# EAGLE board PCB (EAGLE 9.7.0)
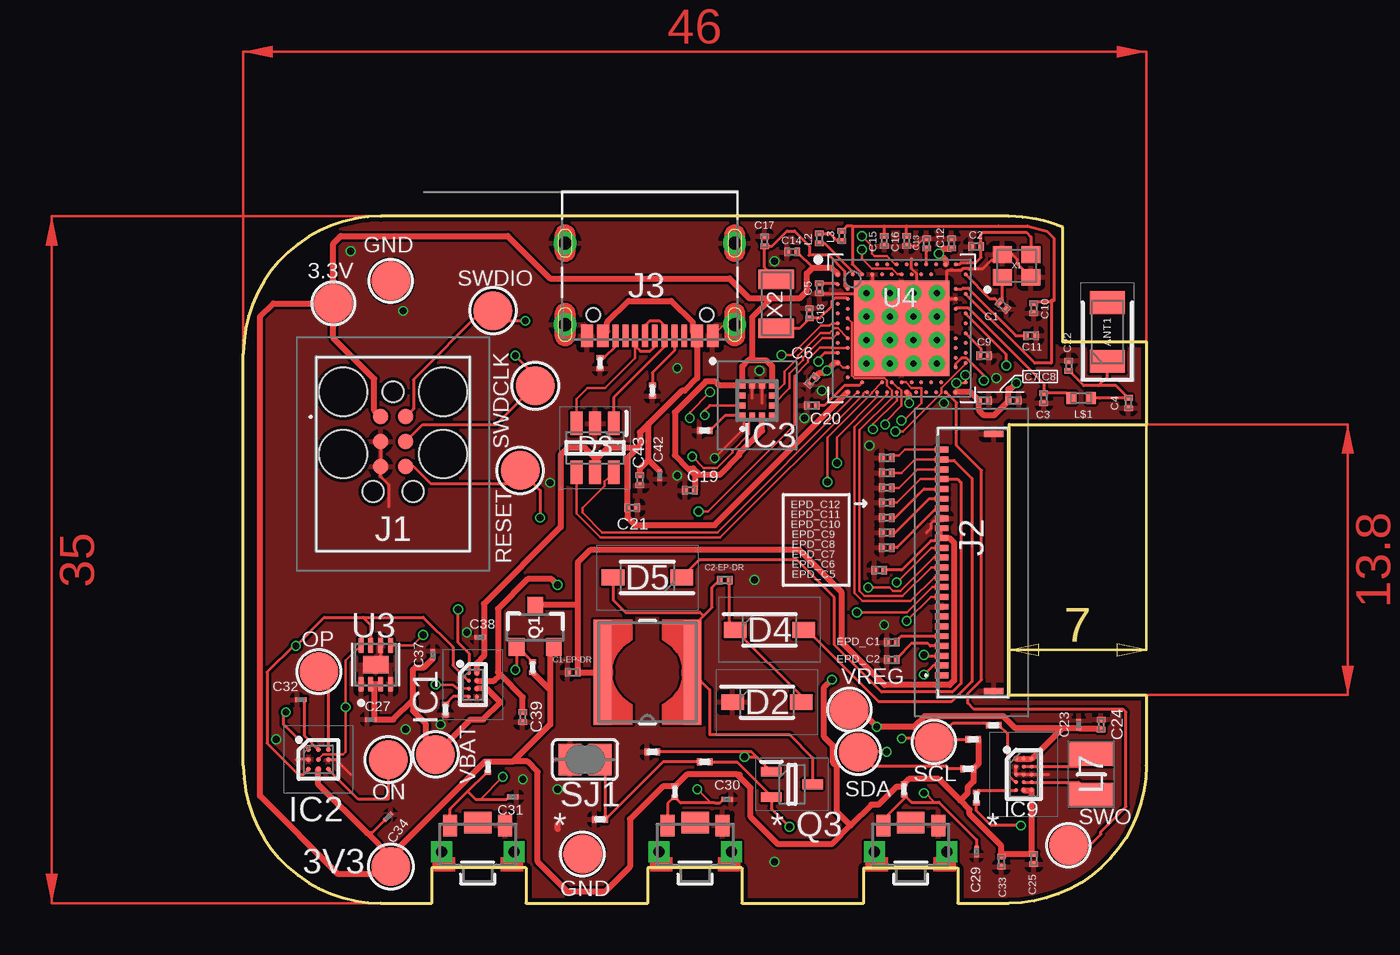
[diagram p0: board, top side]
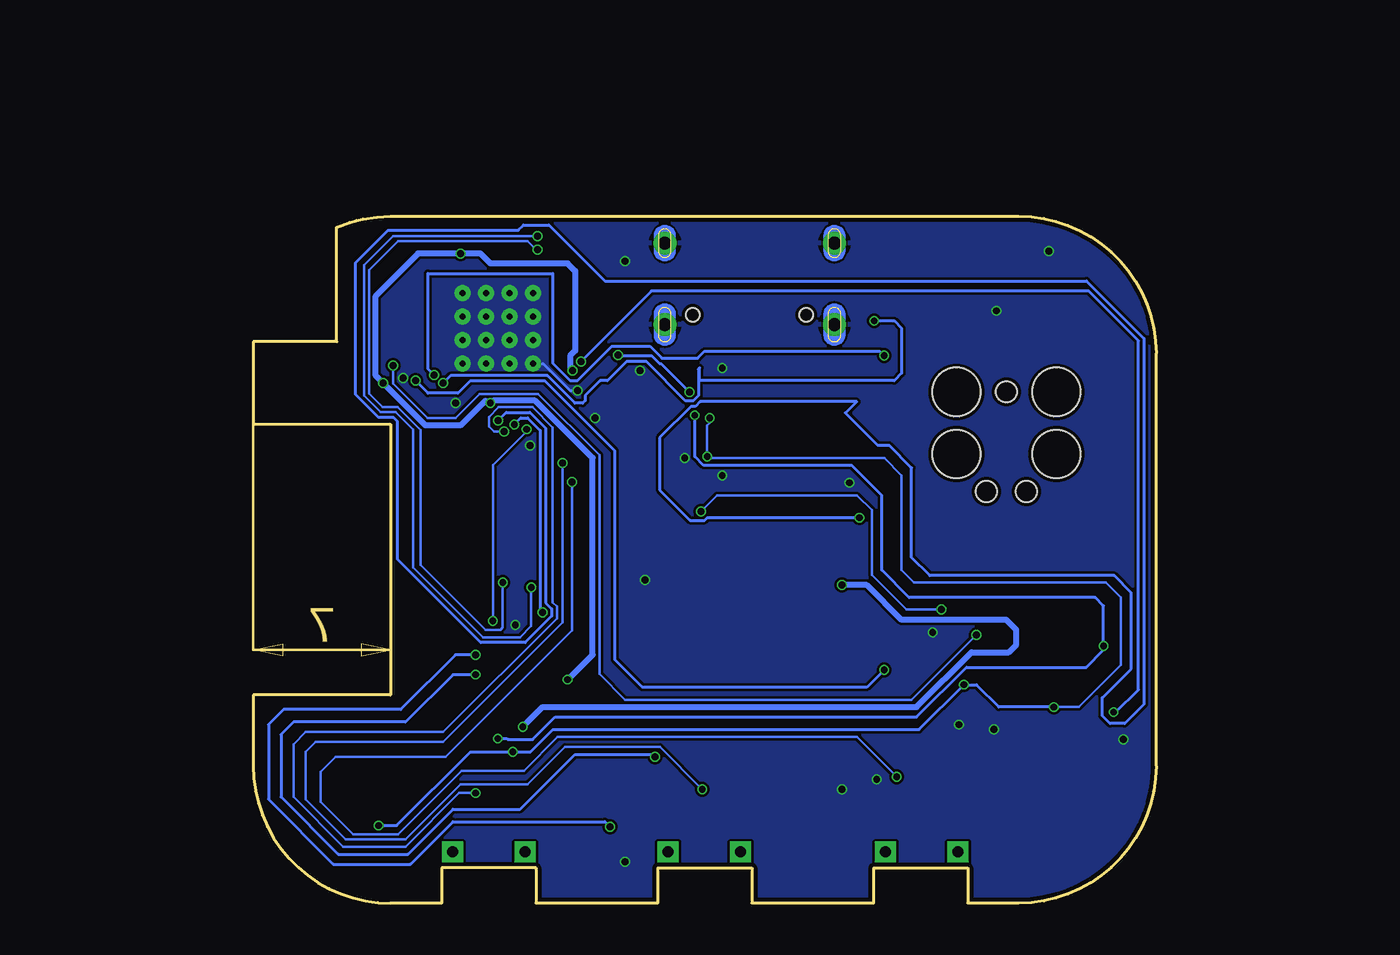
[diagram p1: board, bottom side, seen from below]

Size 46 x 35 mm. Coordinates in mm from the lower left corner, seen from the top.
Outline: 7,0 9.6,0 9.6,1.8 14.4,1.8 14.4,0 20.6,0 20.6,1.8 25.4,1.8 25.4,0 31.6,0 31.6,1.8 36.4,1.8 36.4,0 39,0 arc90 46,7 46,10.6 39,10.6 39,24.4 46,24.4 46,28.61 41.75,28.61 41.75,34.44 41.09,34.69 40.75,34.78 40.4,34.86 39.7,34.95 39,35 7,35 arc90 0,28 0,7 arc90 7,0
Copper layers (1*16): Top 0.035mm / dielectric 1.6mm / Bottom 0.035mm
Design rules "jlcpcb-2layers.dru": minimum track width 5mil, minimum drill 0.3mm, track to track 5mil, track to pad 5mil, pad to pad 5mil, via to via 5mil, smd to smd 5mil, copper to edge 0.2mm, drill to drill 6mil, minimum pad ring 10mil, minimum via ring 3mil, stop-mask expansion 4mil, vias tented up to drill 0mil, thermal gap 10mil

## Footprints (pad centres in the part's own frame; a part is rotated, then mirrored left to right if it is on the bottom)
HECTOR_WATCH_1_TP20R = smd 2 x 2: TP 0,0
2450AT18B100E_ANTC3216X140N = smd 1.15 x 1.8: 1 -1.5,0; 2 1.5,0
NORDIC_NRF_3_RESC0201_L = smd 0.28 x 0.43: 1 -0.255,0; 2 0.255,0
GRM011R60J152KE01L_2_CAPC0201X13N = smd 0.22 x 0.23: 1 -0.185,0; 2 0.185,0
ESP32_C6_LIBRARY_5_SOD3716X135N = smd 1.15 x 0.8: 1 -1.75,0; 2 1.75,0
ESP32_C6_LIBRARY_3_SOT95P280X145-6N = smd 1.2 x 0.6: 1 -1.25,0.95; 2 -1.25,0; 3 -1.25,-0.95; 4 1.25,-0.95; 5 1.25,0; 6 1.25,0.95
BQ25180YBGR_BGA8C40P2X4_100X155X50 = smd 0.2 x 0.2: A1 -0.2,0.6; A2 0.2,0.6; B1 -0.2,0.2; B2 0.2,0.2; C1 -0.2,-0.2; C2 0.2,-0.2; D1 -0.2,-0.6; D2 0.2,-0.6
DRV2605YZFR_BGA9C50P3X3_144X144X62 = smd 0.25 x 0.25: A1 -0.5,0.5; A2 0,0.5; A3 0.5,0.5; B1 -0.5,0; B2 0,0; B3 0.5,0; C1 -0.5,-0.5; C2 0,-0.5; C3 0.5,-0.5
BMA423_BMA423 = smd 0.3 x 0.35: 1 -0.75,-0.775; 2 -0.25,-0.775; 3 0.25,-0.775; 4 0.75,-0.775; 7 0.75,0.775; 8 0.25,0.775; 9 -0.25,0.775; 10 -0.75,0.775 | smd 0.35 x 0.3: 5 0.775,-0.25; 6 0.775,0.25; 11 -0.775,0.25; 12 -0.775,-0.25
RT6160AWSC_BGA15C40P3X5_140X230X60 = smd 0.216 x 0.216: A1 -0.4,0.8; A2 0,0.8; A3 0.4,0.8; B1 -0.4,0.4; B2 0,0.4; B3 0.4,0.4; C1 -0.4,0; C2 0,0; C3 0.4,0; D1 -0.4,-0.4; D2 0,-0.4; D3 0.4,-0.4; E1 -0.4,-0.8; E2 0,-0.8; E3 0.4,-0.8
TC2030-IDC_TC2030IDC = smd 0.783 x 0.783: 1 -0.953,-0.635; 2 -0.953,0.635; 3 0.317,-0.635; 4 0.317,0.635; 5 1.588,-0.635; 6 1.588,0.635 | hole 2.451: -2.223,-2.54; -2.223,2.54; 0.952,-2.54; 0.952,2.54 | hole 1.067: -2.223,0; 2.857,-1.016; 2.857,1.016
503480-2400_5034802400 = smd 0.3 x 0.7: 1 -5.75,1.525; 2 -5.25,1.525; 3 -4.75,1.525; 4 -4.25,1.525; 5 -3.75,1.525; 6 -3.25,1.525; 7 -2.75,1.525; 8 -2.25,1.525; 9 -1.75,1.525; 10 -1.25,1.525; 11 -0.75,1.525; 12 -0.25,1.525; 13 0.25,1.525; 14 0.75,1.525; 15 1.25,1.525; 16 1.75,1.525; 17 2.25,1.525; 18 2.75,1.525; 19 3.25,1.525; 20 3.75,1.525; 21 4.25,1.525; 22 4.75,1.525; 23 5.25,1.525; 24 5.75,1.525 | smd 0.3 x 1: MP1 -6.54,-1.125; MP2 6.54,-1.125
KH-TYPE-C-16P_KINGHELM_KH-TYPE-C-16P = smd 0.6 x 1.15: A1_B12 -3.2,4.725; A4_B9 -2.4,4.725; A9_B4 2.4,4.725; A12_B1 3.2,4.725 | smd 0.3 x 1.15: A5 -1.25,4.725; A6 -0.25,4.725; A7 0.25,4.725; A8 1.25,4.725; B5 1.75,4.725; B6 0.75,4.725; B7 -0.75,4.725; B8 -1.75,4.725 | drill 0.65 pad 1.05: SH1 -4.32,0; SH2 4.32,0; SH3 -4.32,4.15; SH4 4.32,4.15 | hole 0.7: -2.89,3.65; 2.89,3.65
ESP32_C6_LIBRARY_2_IND_4828-WE-TPC_WRE = smd 0.9 x 5.3: 1 -2.286,0; 2 2.286,0
NORDIC_NRF_2_RESC0201_L = smd 0.28 x 0.43: 1 -0.255,0; 2 0.255,0
MLP2016SR47MT0S1_INDC2016X100N = smd 1.2 x 2.2: 1 -1.028,0; 2 1.028,0
NORDIC_NRF_2_RESC0402_L = smd 0.5 x 0.6: 1 -0.5,0; 2 0.5,0
ESP32_C6_LIBRARY_4_ESP32_C6_LIBRARY_4_ESP32_C6_LIBRARY_4_ESP32_C6_LIBRARY_4_ESP32_WROVER_SPARKFUN-DISCRETESEMI_SOT23-3 = smd 0.8 x 0.9: 1 -0.95,-1; 2 0.95,-1; 3 0,1.1
ESP32_C6_LIBRARY_6_SOT65P210X110-3N = smd 1.05 x 0.5: 1 -1.05,0.65; 2 -1.05,-0.65; 3 1.05,0
ERA-1AEB3401C_0201 = smd 0.35 x 0.25: 1 0,0.275; 2 0,-0.275
CPF0201D7K68C1_0201 = smd 0.35 x 0.25: 1 0,0.275; 2 0,-0.275
ESP32_C6_LIBRARY_7_JUMPER_SJ = smd 1.168 x 1.6: 1 -0.762,0; 2 0.762,0
2025-10-22_07-23-44_LIBRARY_SW_EVP-AKE31A_PAN = smd 0.711 x 1.092: 1 -1.4,-0.972; 2 1.4,-0.972 | drill 0.559 pad 0.914 square: 3 -1.848,0.381; 4 1.848,0.381 | smd 1.397 x 1.092: 5 0,-1.124
ESP32_C6_LIBRARY_SON50P200X200X80-9N = smd 0.76 x 0.27: 1 -0.985,0.75; 2 -0.985,0.25; 3 -0.985,-0.25; 4 -0.985,-0.75; 5 0.985,-0.75; 6 0.985,-0.25; 7 0.985,0.25; 8 0.985,0.75 | smd 0.9 x 1.3: 9 0,0
NORDIC_NRF_4_AQFN50P700X700X85_HS-74N = smd 4.85 x 4.85: P$74 0,0 | drill 0.3 pad 0.6: P$75 -1.8,1.8; P$76 -0.6,1.8; P$77 0.6,1.8; P$78 1.8,1.8; P$79 -1.8,0.6; P$80 -0.6,0.6; P$81 0.6,0.6; P$82 1.8,0.6; P$83 -1.8,-0.6; P$84 -0.6,-0.6; P$85 0.6,-0.6; P$86 1.8,-0.6; P$87 -1.8,-1.8; P$88 -0.6,-1.8; P$89 0.6,-1.8; P$90 1.8,-1.8 | smd 0.2 x 0.2: P$A8 -1.25,3.25; P$A10 -0.75,3.25; P$A12 -0.25,3.25; P$A14 0.25,3.25; P$A16 0.75,3.25; P$A18 1.25,3.25; P$A20 1.75,3.25; P$A22 2.25,3.25; P$A23 2.75,3.25; P$AA24 3.25,-2.25; P$AB2 -2.75,-2.5; P$AC5 -2,-2.75; P$AC9 -1,-2.75; P$AC11 -0.5,-2.75; P$AC13 0,-2.75; P$AC15 0.5,-2.75; P$AC17 1,-2.75; P$AC19 1.5,-2.75; P$AC21 2,-2.75; P$AC24 3.25,-2.75; P$AD2 -2.75,-3.25; P$AD4 -2.25,-3.25; P$AD6 -1.75,-3.25; P$AD8 -1.25,-3.25; P$AD10 -0.75,-3.25; P$AD12 -0.25,-3.25; P$AD14 0.25,-3.25; P$AD16 0.75,-3.25; P$AD18 1.25,-3.25; P$AD20 1.75,-3.25; P$AD22 2.25,-3.25; P$AD23 2.75,-3.25; P$B1 -3.25,2.75; P$B3 -2.5,2.75; P$B5 -2,2.75; P$B7 -1.5,2.75; P$B9 -1,2.75; P$B11 -0.5,2.75; P$B13 0,2.75; P$B15 0.5,2.75; P$B17 1,2.75; P$B19 1.5,2.75; P$B24 3.25,2.75; P$C1 -3.25,2.25; P$D2 -2.75,2; P$D23 2.75,2; P$E24 3.25,1.75; P$F2 -2.75,1.5; P$F23 2.75,1.5; P$G1 -3.25,1.25; P$H2 -2.75,1; P$H23 2.75,1; P$J1 -3.25,0.75; P$J24 3.25,0.75; P$K2 -2.75,0.5; P$L1 -3.25,0.25; P$L24 3.25,0.25; P$M2 -2.75,0; P$N1 -3.25,-0.25; P$N24 3.25,-0.25; P$P2 -2.75,-0.5; P$P23 2.75,-0.5; P$R1 -3.25,-0.75; P$R24 3.25,-0.75; P$T2 -2.75,-1; P$T23 2.75,-1; P$U1 -3.25,-1.25; P$U24 3.25,-1.25; P$V23 2.75,-1.5; P$W1 -3.25,-1.75; P$W24 3.25,-1.75; P$Y2 -2.75,-2; P$Y23 2.75,-2
NORDIC_NRF_BT-XTAL_2016_N = smd 0.95 x 0.85: 1 -0.725,-0.575; 2 0.725,-0.575; 3 0.725,0.575; 4 -0.725,0.575
NORDIC_NRF_1_XTAL_3215_N = smd 1 x 1.8: 1 -1.25,0; 2 1.25,0

## Placement (x,y rotation side)
3.3V  HECTOR_WATCH_1_TPTP20R  [HECTOR_WATCH_1_TP20R]  4.58,30.56 0 top
3V3  HECTOR_WATCH_1_TPTP20R  [HECTOR_WATCH_1_TP20R]  7.5,1.86 90 top
ANT1  2450AT18B100E  [2450AT18B100E_ANTC3216X140N]  44.01,29.1 90 top
C1  12pF  [NORDIC_NRF_3_RESC0201_L]  38.69,30.44 319.3 top
C1-EP-DR  10uF  [NORDIC_NRF_3_RESC0201_L]  16.77,11.77 180 top
C2  12pF  [NORDIC_NRF_3_RESC0201_L]  37.32,33.46 180 top
C2-EP-DR  4.7uF  [NORDIC_NRF_3_RESC0201_L]  24.52,16.47 180 top
C3  1pF  [NORDIC_NRF_3_RESC0201_L]  40.78,25.74 270 top
C4  1pF  [NORDIC_NRF_3_RESC0201_L]  45.09,25.48 270 top
C5  100nF  [NORDIC_NRF_3_RESC0201_L]  29.35,31.33 270 top
C6  4.7μF  [NORDIC_NRF_3_RESC0201_L]  28.97,26.63 228.3 top
C7  100nF  [NORDIC_NRF_3_RESC0201_L]  37.73,25.61 0 top
C8  100nF N.C.  [NORDIC_NRF_3_RESC0201_L]  39.25,25.61 0 top
C9  820pF  [NORDIC_NRF_3_RESC0201_L]  37.73,27.9 0 top
C10  N.C.  [NORDIC_NRF_3_RESC0201_L]  40.27,30.31 270 top
C11  100pF  [NORDIC_NRF_3_RESC0201_L]  40.14,28.91 0 top
C12  100nF  [NORDIC_NRF_3_RESC0201_L]  36.08,33.61 90 top
C13  N.C.  [NORDIC_NRF_3_RESC0201_L]  34.81,33.61 90 top
C14  4.7μF  [NORDIC_NRF_3_RESC0201_L]  27.95,33.19 180 top
C15  1.0μF  [NORDIC_NRF_3_RESC0201_L]  32.65,33.74 270 top
C16  47nF  [NORDIC_NRF_3_RESC0201_L]  33.79,33.74 270 top
C17  12pF  [NORDIC_NRF_3_RESC0201_L]  26.55,33.73 270 top
C18  12pF  [NORDIC_NRF_3_RESC0201_L]  28.84,30.05 270 top
C19  100nF  [NORDIC_NRF_3_RESC0201_L]  22.74,21.04 180 top
C20  4.7μF  [NORDIC_NRF_3_RESC0201_L]  28.97,25.36 180 top
C21  4.7μF  [NORDIC_NRF_3_RESC0201_L]  19.82,20.15 0 top
C22  N.C.  [NORDIC_NRF_3_RESC0201_L]  42.05,27.39 90 top
C23  0.1uF  [GRM011R60J152KE01L_2_CAPC0201X13N]  42.55,9.1 270 top
C24  10uF  [NORDIC_NRF_3_RESC0201_L]  43.7,9.1 270 top
C25  22uF  [NORDIC_NRF_3_RESC0201_L]  40.27,2.24 270 top
C27  0.1uF  [GRM011R60J152KE01L_2_CAPC0201X13N]  6.49,9.35 0 top
C29  1uF  [GRM011R60J152KE01L_2_CAPC0201X13N]  37.35,2.62 90 top
C30  1uF  [GRM011R60J152KE01L_2_CAPC0201X13N]  24.65,5.29 180 top
C31  1uF  [GRM011R60J152KE01L_2_CAPC0201X13N]  13.72,5.42 180 top
C32  1uF  [GRM011R60J152KE01L_2_CAPC0201X13N]  2.93,10.37 0 top
C33  22uF  [NORDIC_NRF_3_RESC0201_L]  38.62,2.12 270 top
C34  0.1uF  [GRM011R60J152KE01L_2_CAPC0201X13N]  7.37,4.4 225 top
C37  1uF  [GRM011R60J152KE01L_2_CAPC0201X13N]  9.66,12.66 270 top
C38  1uF  [GRM011R60J152KE01L_2_CAPC0201X13N]  12.07,13.55 0 top
C39  10uF  [NORDIC_NRF_3_RESC0201_L]  14.23,9.48 270 top
C42  0.1uF  [GRM011R60J152KE01L_2_CAPC0201X13N]  21.22,21.8 270 top
C43  4.7uF  [NORDIC_NRF_3_RESC0201_L]  20.2,21.55 270 top
D2  MBR0530  [ESP32_C6_LIBRARY_5_SOD3716X135N]  26.68,10.24 0 top
D3  USBLC6-2SC6Y  [ESP32_C6_LIBRARY_3_SOT95P280X145-6N]  17.92,23.2 270 top
D4  MBR0530  [ESP32_C6_LIBRARY_5_SOD3716X135N]  26.81,13.93 0 top
D5  MBR0530  [ESP32_C6_LIBRARY_5_SOD3716X135N]  20.58,16.59 180 top
EPD_C1  1uF/50V  [NORDIC_NRF_3_RESC0201_L]  33.03,13.29 0 top
EPD_C2  1uF/50V  [NORDIC_NRF_3_RESC0201_L]  33.03,12.4 0 top
EPD_C5  0.1uF/50V  [NORDIC_NRF_3_RESC0201_L]  32.39,16.97 0 top
EPD_C6  1uF/50V  [NORDIC_NRF_3_RESC0201_L]  32.77,18.12 0 top
EPD_C7  1uF/50V  [NORDIC_NRF_3_RESC0201_L]  32.77,18.88 0 top
EPD_C8  1uF/50V  [NORDIC_NRF_3_RESC0201_L]  32.77,19.64 0 top
EPD_C9  1uF/50V  [NORDIC_NRF_3_RESC0201_L]  32.77,20.4 0 top
EPD_C10  1uF/50V  [NORDIC_NRF_3_RESC0201_L]  32.77,21.17 0 top
EPD_C11  1uF/50V  [NORDIC_NRF_3_RESC0201_L]  32.77,21.93 0 top
EPD_C12  1uF/50V  [NORDIC_NRF_3_RESC0201_L]  32.77,22.69 0 top
GND  HECTOR_WATCH_1_TPTP20R  [HECTOR_WATCH_1_TP20R]  7.5,31.71 0 top
IC1  BQ25180YBGR  [BQ25180YBGR_BGA8C40P2X4_100X155X50]  11.69,11.13 0 top
IC2  DRV2605YZFR  [DRV2605YZFR_BGA9C50P3X3_144X144X62]  3.82,7.32 0 top
IC3  BMA423  [BMA423_BMA423]  26.17,25.61 0 top
IC9  RT6160AWSC  [RT6160AWSC_BGA15C40P3X5_140X230X60]  39.76,6.56 0 top
J1  TC2030-IDC  [TC2030-IDC_TC2030IDC]  7.63,23.83 270 top
J2  503480-2400  [503480-2400_5034802400]  37.1,17.36 90 top
J3  KH-TYPE-C-16P  [KH-TYPE-C-16P_KINGHELM_KH-TYPE-C-16P]  20.71,33.63 180 top
L1  68uH  [ESP32_C6_LIBRARY_2_IND_4828-WE-TPC_WRE]  20.58,11.77 180 top
L2  10μH  [NORDIC_NRF_2_RESC0201_L]  29.35,33.86 90 top
L3  15nH  [NORDIC_NRF_2_RESC0201_L]  30.49,33.99 90 top
L7  FTC252012SR47MBCA  [MLP2016SR47MT0S1_INDC2016X100N]  43.19,6.56 270 top
L$1  3.9nH  [NORDIC_NRF_2_RESC0402_L]  42.68,25.74 0 top
ON  HECTOR_WATCH_1_TPTP20R  [HECTOR_WATCH_1_TP20R]  7.37,7.32 0 top
OP  HECTOR_WATCH_1_TPTP20R  [HECTOR_WATCH_1_TP20R]  3.84,11.79 0 top
Q1  20V/4.2A/52mΩ/1.4W  [ESP32_C6_LIBRARY_4_ESP32_C6_LIBRARY_4_ESP32_C6_LIBRARY_4_ESP32_C6_LIBRARY_4_ESP32_WROVER_SPARKFUN-DISCRETESEMI_SOT23-3]  14.87,14.05 0 top
Q3  SI1308EDL-T1-GE3  [ESP32_C6_LIBRARY_6_SOT65P210X110-3N]  27.95,6.05 0 top
R1_EP_DR'  0.47  [ERA-1AEB3401C_0201]  23.5,7.2 90 top
R1_USB  5K1  [ERA-1AEB3401C_0201]  20.84,26.12 180 top
R2  0  [ERA-1AEB3401C_0201]  37.35,5.39 180 top
R2_EP_DR  10K  [ERA-1AEB3401C_0201]  20.84,7.7 90 top
R2_USB  5K1  [ERA-1AEB3401C_0201]  18.17,27.52 0 top
R3  0  [ERA-1AEB3401C_0201]  23.5,24.09 90 top
R4  0  [ERA-1AEB3401C_0201]  38.22,9.07 90 top
R5  10K  [ERA-1AEB3401C_0201]  21.98,5.67 180 top
R7  10K  [ERA-1AEB3401C_0201]  33.66,5.8 180 top
R8  10K  [ERA-1AEB3401C_0201]  12.46,6.94 180 top
R9  10k  [CPF0201D7K68C1_0201]  10.3,9.86 180 top
R17  3K3  [ERA-1AEB3401C_0201]  37.18,8.34 270 top
R18  3K3  [ERA-1AEB3401C_0201]  36.92,6.84 270 top
R_PWR_EPD  10k  [ERA-1AEB3401C_0201]  14.74,12.02 0 top
R_TYPE_SEL  2.2  [ERA-1AEB3401C_0201]  18.17,4.27 90 top
RESET  HECTOR_WATCH_1_TPTP20R  [HECTOR_WATCH_1_TP20R]  14.11,22.05 0 top
SCL  HECTOR_WATCH_1_TPTP20R  [HECTOR_WATCH_1_TP20R]  35.19,8.21 90 top
SDA  HECTOR_WATCH_1_TPTP20R  [HECTOR_WATCH_1_TP20R]  31.32,7.69 90 top
SJ1  [ESP32_C6_LIBRARY_7_JUMPER_SJ]  17.41,7.32 0 top
SW_DN  2025-10-22_07-23-44_LIBRARY_EVP-AKE31ASW_EVP-AKE31A_PAN  [2025-10-22_07-23-44_LIBRARY_SW_EVP-AKE31A_PAN]  34,2.99 180 top
SW_ENT  2025-10-22_07-23-44_LIBRARY_EVP-AKE31ASW_EVP-AKE31A_PAN  [2025-10-22_07-23-44_LIBRARY_SW_EVP-AKE31A_PAN]  11.94,2.99 180 top
SW_UP  2025-10-22_07-23-44_LIBRARY_EVP-AKE31ASW_EVP-AKE31A_PAN  [2025-10-22_07-23-44_LIBRARY_SW_EVP-AKE31A_PAN]  23.02,2.99 180 top
SWDCLK  HECTOR_WATCH_1_TPTP20R  [HECTOR_WATCH_1_TP20R]  14.87,26.37 0 top
SWDIO  HECTOR_WATCH_1_TPTP20R  [HECTOR_WATCH_1_TP20R]  12.71,30.18 0 top
SWO  HECTOR_WATCH_1_TPTP20R  [HECTOR_WATCH_1_TP20R]  42.03,2.95 0 top
TP_BAT_GND  HECTOR_WATCH_1_TPTP20R  [HECTOR_WATCH_1_TP20R]  17.28,2.5 0 top
U3  MAX17048G+T10  [ESP32_C6_LIBRARY_SON50P200X200X80-9N]  6.74,12.15 90 top
U4  NRF52840_QF  [NORDIC_NRF_4_AQFN50P700X700X85_HS-74N]  33.54,29.29 0 top
VBAT  HECTOR_WATCH_1_TPTP20R  [HECTOR_WATCH_1_TP20R]  9.79,7.58 0 top
VREG  HECTOR_WATCH_1_TPTP20R  [HECTOR_WATCH_1_TP20R]  30.87,9.86 90 top
X1  32MHz  [NORDIC_NRF_BT-XTAL_2016_N]  39.4,32.47 0 top
X2  32.768kHz  [NORDIC_NRF_1_XTAL_3215_N]  27.15,30.54 270 top

## Library data of the parts
3.3V 3V3 C1 C1-EP-DR C2 C2-EP-DR C3-C22 C24 C25 C33 C39 C43 EPD_C1 EPD_C2 EPD_C5-EPD_C12 GND L2 L3 L$1 ON OP R1_EP_DR' R1_USB R2 R2_EP_DR R2_USB R3-R5 R7-R9 R17 R18 R_PWR_EPD R_TYPE_SEL RESET SCL SDA SJ1 SWDCLK SWDIO SWO TP_BAT_GND U4 VBAT VREG X1 X2 = InkTime_v5
ANT1 = InkTime_v5; ARROW_PART_NUMBER: 2450AT18B100E; ARROW_PRICE-STOCK: https://www.arrow.com/en/products/2450at18b100e/johanson-dielectrics?utm_currency=USD&region=nac; DESCRIPTION: Antennas 2.45GHz ANTENNA; HEIGHT: 1.4mm; MANUFACTURER_NAME: JOHANSON TECHNOLOGY; MANUFACTURER_PART_NUMBER: 2450AT18B100E; MOUSER_PART_NUMBER: 609-2450AT18B100E; MOUSER_PRICE-STOCK: https://www.mouser.co.uk/ProductDetail/Johanson-Technology/2450AT18B100E?qs=yCnrNFeXz%252Bh5MFsFIXGZGA%3D%3D
C23 C27 C29-C32 C34 C37 C38 C42 = InkTime_v5; AVAILABILITY: In Stock; CHECK_PRICES: https://www.snapeda.com/parts/GRM011R60J152KE01L/Murata/view-part/?ref=eda; DESCRIPTION: SMD Capacitor X5R(EIA) with Capacitance: 1500pF Tol. 10%. Rated Voltage: 6.3Vdc; MF: Murata; MP: GRM011R60J152KE01L; PACKAGE: 0201 Murata; PRICE: None; SNAPEDA_LINK: https://www.snapeda.com/parts/GRM011R60J152KE01L/Murata/view-part/?ref=snap
D2 D4 D5 = InkTime_v5; AVAILABILITY: In Stock; CHECK_PRICES: https://www.snapeda.com/parts/MBR0530/Onsemi/view-part/?ref=eda; DESCRIPTION: Diode Schottky 30 V 500mA Surface Mount SOD-123; MF: ON Semiconductor; MP: MBR0530; PACKAGE: SOD-123-2 ON Semiconductor; PRICE: None; PURCHASE-URL: https://www.snapeda.com/api/url_track_click_mouser/?unipart_id=179458&manufacturer=ON Semiconductor&part_name=MBR0530&search_term=None; SNAPEDA_LINK: https://www.snapeda.com/parts/MBR0530/Onsemi/view-part/?ref=snap
D3 = InkTime_v5; AVAILABILITY: In Stock; CHECK_PRICES: https://www.snapeda.com/parts/USBLC6-2SC6Y/STMicroelectronics/view-part/?ref=eda; DESCRIPTION: 17V Clamp 5A (8/20µs) Ipp Tvs Diode Surface Mount SOT-23-6; MF: STMicroelectronics; MP: USBLC6-2SC6Y; PACKAGE: SOT-23-6 STMicroelectronics; PRICE: None; SNAPEDA_LINK: https://www.snapeda.com/parts/USBLC6-2SC6Y/STMicroelectronics/view-part/?ref=snap
IC1 = InkTime_v5; ARROW_PART_NUMBER: BQ25180YBGR; ARROW_PRICE-STOCK: https://www.arrow.com/en/products/bq25180ybgr/texas-instruments?utm_currency=USD&region=nac; DESCRIPTION: Charger IC Lithium Ion/Polymer, Lithium Iron Phosphate 8-DSBGA (1.6x1.1); HEIGHT: 0.5mm; MANUFACTURER_NAME: Texas Instruments; MANUFACTURER_PART_NUMBER: BQ25180YBGR; MOUSER_PART_NUMBER: 595-BQ25180YBGR; MOUSER_PRICE-STOCK: https://www.mouser.co.uk/ProductDetail/Texas-Instruments/BQ25180YBGR?qs=doiCPypUmgEWjAK%252BJAX6Tw%3D%3D
IC2 = InkTime_v5; ARROW_PART_NUMBER: DRV2605YZFR; ARROW_PRICE-STOCK: https://www.arrow.com/en/products/drv2605yzfr/texas-instruments?region=nac; DESCRIPTION: Haptic Driver for ERM/LRA with Built-In Library and Smart Loop Architecture; HEIGHT: 0.625mm; MANUFACTURER_NAME: Texas Instruments; MANUFACTURER_PART_NUMBER: DRV2605YZFR
IC3 = InkTime_v5; ARROW_PART_NUMBER: BMA423; ARROW_PRICE-STOCK: https://www.arrow.com/en/products/bma423/bosch; DESCRIPTION: Accelerometers Triaxial low-g 12bit Acceleration Sensor; HEIGHT: 1mm; MANUFACTURER_NAME: BOSCH; MANUFACTURER_PART_NUMBER: BMA423; MOUSER_PART_NUMBER: 262-BMA423; MOUSER_PRICE-STOCK: https://www.mouser.co.uk/ProductDetail/Bosch-Sensortec/BMA423?qs=HXFqYaX1Q2xC%252BSgeGoX3mg%3D%3D
IC9 = InkTime_v5; DESCRIPTION: Buck-Boost Regulator Positive Output Step-Up/Step-Down I2C DC-DC Controller IC 15-WL-CSP (BSC) (1.4x2.3); HEIGHT: 0.6mm; MANUFACTURER_NAME: RICHTEK; MANUFACTURER_PART_NUMBER: RT6160AWSC; MOUSER_PART_NUMBER: 835-RT6160AWSC; MOUSER_PRICE-STOCK: https://www.mouser.co.uk/ProductDetail/Richtek/RT6160AWSC?qs=amGC7iS6iy%2FLd9PSoixZXQ%3D%3D
J1 = InkTime_v5; DESCRIPTION: CABLE ADAPTER 6 POS; HEIGHT: 19mm; MANUFACTURER_NAME: Tag Connect; MANUFACTURER_PART_NUMBER: TC2030-IDC
J2 = InkTime_v5; DESCRIPTION: FFC & FPC Connectors 0.5mm FPC RA SMT Dual Contact 24Ckt; HEIGHT: 1.87mm; MANUFACTURER_NAME: Molex; MANUFACTURER_PART_NUMBER: 503480-2400; MOUSER_PART_NUMBER: 538-503480-2400; MOUSER_PRICE-STOCK: https://www.mouser.co.uk/ProductDetail/Molex/503480-2400?qs=OAhjpuo3Vu7efIoxFh9AOw%3D%3D
J3 = InkTime_v5; AVAILABILITY: Not in stock; CHECK_PRICES: https://www.snapeda.com/parts/KH-TYPE-C-16P/Kinghelm/view-part/?ref=eda; MF: kinghelm; MP: KH-TYPE-C-16P; PACKAGE: None; PRICE: None; SNAPEDA_LINK: https://www.snapeda.com/parts/KH-TYPE-C-16P/Kinghelm/view-part/?ref=snap
L1 = InkTime_v5; COPYRIGHT: Copyright (C) 2024 Ultra Librarian. All rights reserved.; MANUFACTURER_PART_NUMBER: 744043680; MFR_NAME: Wurth Electronics
L7 = InkTime_v5; DESCRIPTION: SMD / SMT Inductors (Coils), L=0.47?H, L x W x T :; HEIGHT: 1mm; JLCPCB: https://jlcpcb.com/partdetail/6763488-FTC252012SR47MBCA/C5832368; MANUFACTURER_NAME: TDK; MANUFACTURER_PART_NUMBER: FTC252012SR47MBCA
Q1 = InkTime_v5; PROD_ID: TRAN-14388
Q3 = InkTime_v5; AVAILABILITY: In Stock; CHECK_PRICES: https://www.snapeda.com/parts/SI1308EDL-T1-GE3/Vishay+Siliconix/view-part/?ref=eda; DESCRIPTION: Si1308EDL-T1-GE3 N-channel MOSFET Transistor, 1.5 A, 30 V, 3-Pin SC-70 | Siliconix / Vishay SI1308EDL-T1-GE3; MF: Vishay Siliconix; MP: SI1308EDL-T1-GE3; PACKAGE: SOT-323 Vishay Semiconductor; PRICE: None; PURCHASE-URL: https://www.snapeda.com/api/url_track_click_mouser/?unipart_id=274603&manufacturer=Vishay Siliconix&part_name=SI1308EDL-T1-GE3&search_term=None; SNAPEDA_LINK: https://www.snapeda.com/parts/SI1308EDL-T1-GE3/Vishay+Siliconix/view-part/?ref=snap
SW_DN SW_ENT SW_UP = InkTime_v5; COPYRIGHT: Copyright (C) 2025 Ultra Librarian. All rights reserved.; DIGI-KEY_PART_NUMBER_1: P123437TR-ND; DIGI-KEY_PART_NUMBER_2: P123437CT-ND; DIGI-KEY_PART_NUMBER_3: P123437DKR-ND; MANUFACTURER_NAME: Panasonic; MANUFACTURER_PART_NUMBER: EVP-AKE31A
U3 = InkTime_v5; AVAILABILITY: In Stock; CHECK_PRICES: https://www.snapeda.com/parts/MAX17048G+T10/Analog+Devices/view-part/?ref=eda; DESCRIPTION: 3µA 1-Cell/2-Cell Fuel Gauge with ModelGauge; MF: Analog Devices; MP: MAX17048G+T10; PACKAGE: TDFN-8 Maxim; PRICE: None; PURCHASE-URL: https://www.snapeda.com/api/url_track_click_mouser/?unipart_id=329239&manufacturer=Analog Devices&part_name=MAX17048G+T10&search_term=None; SNAPEDA_LINK: https://www.snapeda.com/parts/MAX17048G+T10/Analog+Devices/view-part/?ref=snap

## Nets
0.25: U4.P$AC21
3V3: 3.3V.TP 3V3.TP C6.1 C7.1 C8.1 C12.1 C14.1 C19.1 C25.1 C33.1 C34.2 IC2.C2 IC3.3 IC3.7 IC3.10 IC9.E2 IC9.E3 J1.1 Q1.2 R5.2 R7.2 R8.2 R17.1 R18.1 R_PWR_EPD.2 U4.P$A22 U4.P$AD14 U4.P$AD23 U4.P$B1 U4.P$W1 U4.P$Y2
ALERT: U3.5 U4.P$J24
D+: D3.4 U4.P$AD6
D-: D3.6 U4.P$AD4
DN: D3.1 J3.A7 J3.B7
DP: D3.3 J3.A6 J3.B6
EPD_3V3: C1-EP-DR.1 EPD_C5.2 J2.15 J2.16 L1.2 Q1.3
EPD_BUSY: J2.9 U4.P$AD12
EPD_CS: J2.12 U4.P$K2
EPD_DC: J2.11 U4.P$AD10
EPD_RST: J2.10 U4.P$AC11
GDR: J2.2 Q3.1 R2_EP_DR.2
GND: C1-EP-DR.2 C1.2 C2.2 C3.2 C4.2 C5.2 C6.2 C7.2 C8.2 C9.2 C10.2 C11.2 C12.2 C13.2 C14.2 C15.2 C16.2 C17.1 C18.1 C19.2 C20.2 C21.2 C22.2 C23.1 C24.1 C25.2 C27.1 C29.1 C30.1 C31.1 C32.1 C33.2 C34.1 C37.1 C38.1 C39.2 C42.2 C43.2 D2.1 D3.2 EPD_C1.1 EPD_C2.1 EPD_C5.1 EPD_C6.1 EPD_C7.1 EPD_C8.1 EPD_C9.1 EPD_C10.1 EPD_C11.1 EPD_C12.1 GND.TP IC1.D2 IC2.B1 IC2.B3 IC3.8 IC3.9 IC9.B1 IC9.C1 IC9.C2 IC9.C3 J1.3 J1.5 J2.8 J2.17 J2.MP1 J2.MP2 J3.A1_B12 J3.A12_B1 J3.SH1 J3.SH2 J3.SH3 J3.SH4 R1_USB.1 R2_EP_DR.1 R2_USB.2 R3.1 R9.1 R_TYPE_SEL.1 SJ1.1 SW_DN.1 SW_ENT.1 SW_UP.1 TP_BAT_GND.TP U3.1 U3.4 U3.6 U3.9 U4.P$74 U4.P$75 U4.P$76 U4.P$77 U4.P$78 U4.P$79 U4.P$80 U4.P$81 U4.P$82 U4.P$83 U4.P$84 U4.P$85 U4.P$86 U4.P$87 U4.P$88 U4.P$89 U4.P$90 U4.P$B7 U4.P$F23 X1.2 X1.4
HAPTIC_EN: IC2.A1 U4.P$U1
IMU_INT1: IC3.5 U4.P$N1
IMU_INT2: IC3.6 U4.P$P2
LX1: IC9.B2 IC9.B3 L7.1
LX2: IC9.D2 IC9.D3 L7.2
MOSI: J2.14 U4.P$B13
N$1: IC1.D1 R9.2
N$7: IC9.D1 R4.2
N$8: IC9.E1 R2.2
N$10: C5.1 U4.P$C1
N$13: C20.1 U4.P$AC5
N$18: C9.1 U4.P$N24
N$19: C3.1 L$1.1 U4.P$H23
N$20: ANT1.1 C4.1 C22.1 L$1.2
N$21: C2.1 U4.P$A23 X1.3
N$22: C1.1 U4.P$B24 X1.1
N$23: C10.1 C15.1 C16.1 L3.2 U4.P$B5 U4.P$E24
N$24: C11.1 U4.P$D23
N$26: C13.1 U4.P$A18
N$27: L2.2 L3.1
N$28: L2.1 U4.P$B3
N$30: IC3.1 R3.2
N$32: C2-EP-DR.2 D5.2 L1.1 Q3.3
N$34: C2-EP-DR.1 D2.2 D4.1
N$35: R1_EP_DR'.1 R_TYPE_SEL.2 SJ1.2
N$39: C32.2 IC2.A2
N$40: EPD_C2.2 J2.4
N$41: EPD_C1.2 J2.5
N$43: EPD_C6.2 J2.18
N$44: EPD_C7.2 J2.19
N$45: EPD_C8.2 J2.20
N$47: EPD_C10.2 J2.22
N$49: EPD_C12.2 J2.24
N$51: J3.B5 R2_USB.1
N$57: J3.A5 R1_USB.2
OUT+: IC2.A3 OP.TP
OUT-: IC2.C3 ON.TP
P0.00/XL1: C17.2 U4.P$D2 X2.1
P0.01/XL2: C18.2 U4.P$F2 X2.2
P0.04: U4.P$J1
P0.09: U4.P$L24
P0.13: C30.2 R5.1 SW_UP.2 U4.P$AD8
P0.14: C31.2 R8.1 SW_ENT.2 U4.P$AC9
P0.19: U4.P$AC15
P0.20: U4.P$AD16
P0.21: U4.P$AC17
P0.22: U4.P$AD18
P0.23: U4.P$AC19
P0.24: U4.P$AD20
P0.26: U4.P$G1
P0.27: U4.P$H2
P0.28: U4.P$B11
P0.29: U4.P$A10
P0.30: U4.P$B9
P0.31: U4.P$A8
P1.01: Q1.1 R_PWR_EPD.1 U4.P$Y23
P1.02: C29.2 R7.1 SW_DN.2 U4.P$W24
P1.03: U4.P$V23
P1.04: U4.P$U24
P1.05: U4.P$T23
P1.06: U4.P$R24
P1.07: U4.P$P23
P1.09: U4.P$R1
P1.10: U4.P$A20
P1.11: U4.P$B19
P1.12: U4.P$B17
P1.13: U4.P$A16
P1.14: U4.P$B15
P1.15: U4.P$A14
PMIC_INT: IC1.A1 U4.P$T2
PREVGH: D5.1 EPD_C9.2 J2.21
PREVGL: D4.2 EPD_C11.2 J2.23
RESE: J2.3 Q3.2 R1_EP_DR'.2
RESET: J1.6 RESET.TP U4.P$AC13
SCK: J2.13 U4.P$A12
SCL: IC1.B1 IC2.C1 IC3.12 R4.1 R17.2 SCL.TP U3.7
SCL/2.4C: U4.P$M2
SDA: IC1.C1 IC2.B2 IC3.2 R2.1 R18.2 SDA.TP U3.8 U4.P$L1
SWDCLK: J1.4 SWDCLK.TP U4.P$AA24
SWDIO: J1.2 SWDIO.TP U4.P$AC24
SWO: SWO.TP U4.P$AD22
VBAT: C27.2 C37.2 IC1.C2 U3.2 U3.3 VBAT.TP
VBUS: C21.1 C38.2 C42.1 C43.1 D3.5 IC1.A2 J3.A4_B9 J3.A9_B4 U4.P$AD2
VREG: C23.2 C24.2 C39.1 IC1.B2 IC9.A1 IC9.A2 IC9.A3 VREG.TP

## Tracks (layer width: path | path; a pad name or v marks a point on that pad's centre or on a via)
3V3  (via drill 0.35)
  Top 0.127: U4.P$Y2 30.54,27.29 U4.P$W1
  Top 0.152: 36.04,33.23 36.04,33.36 C12.1 | C34.2 6.55,3.58 6.29,3.58 | C14.1 29.01,32.38
  Top 0.305: 25.16,6.56 22.59,6.56 R5.2 21.37,5.95 19.69,4.27 19.69,1.86 18.42,0.59 16.52,0.59 14.99,2.12 14.99,6.69 14.47,7.22 13.75,7.22 | IC9.E2 IC9.E3 40.14,5.74 40.14,2.62 C25.1 38.82,2.5 38.69,2.37 C33.1 38.62,2.92 36.99,4.55 36.99,4.76 36.52,5.23 | IC2.C2 3.82,6.05 6.29,3.58 7.5,2.37 3V3.TP | 26.88,30.82 28.33,30.82 28.71,31.2 28.71,32.09 29.01,32.38 29.95,32.38 U4.P$B1 | 26.88,30.82 25.79,30.82 24.77,31.83 15.63,31.83 13.47,33.99 4.96,33.99 4.58,33.61 3.3V.TP | 36.52,5.23 35.42,6.33 33.92,6.33 R7.2 33.52,5.93 33.28,5.93 32.36,5.01 31.99,5.01 30.93,3.96 | 3V3.TP 8.01,1.48 8.01,2.92 12.31,7.22 R8.2 13.75,7.22 | 3V3.TP 7.12,1.48 4.83,1.48 0.85,5.47 0.85,29.88 1.53,30.56 3.3V.TP | R17.1 37.45,7.1 R18.1 37.19,6.2 36.89,5.9 36.89,5.6 36.52,5.23 | 30.93,3.96 29.98,3 27.24,3 25.84,4.4 25.84,5.87 25.16,6.56 | Q1.2 15.63,12.86 15.63,10.86 | 15.63,10.86 15.63,9.1 13.75,7.22 | IC3.7 26.93,26.4 26.93,27.36 26.62,27.67 25.79,27.67 | J1.1 6.67,25.11 6.67,26.71 4.58,28.79 3.3V.TP | R_PWR_EPD.2 15.63,10.86 | 22.65,22.16 21.98,22.83 21.98,25 23.56,26.58 24.05,26.58 24.24,26.39 IC3.10 25.42,27.37 25.72,27.67 25.79,27.67 | C19.1 23,21.81 22.65,22.16 | 22.65,22.16 22.91,22.16 23.23,21.84 24.27,21.84 25.26,22.83 25.26,22.91 26.42,24.07 IC3.3 | 26.88,30.82 25.92,29.85 25.92,27.79 25.79,27.67 | 25.16,6.56 25.28,6.56 | 30.93,3.96 30.23,4.66 30.23,6.96 30.04,7.16 30.04,8.02 29.59,8.47 29.59,11 v29.98,11.39 | U4.P$AD23 37.04,26.04 C7.1 37.47,25.1 37.73,24.85 38.24,24.85 C8.1 38.96,25.65 38.96,26.2 39.08,26.2 v39.38,26.5 | U4.P$AD14 33.92,25.91 v33.92,25.48 | U4.P$A22 35.79,32.76 v35.44,33.1 35.7,33.36 36.04,33.36
  Top 0.305: C6.1 29.33,27.01 29.6,27.01 v29.73,27.13 30.14,27.54 U4.P$W1
  Bottom 0.305: v29.98,11.39 28.71,12.66 28.71,22.69 31.63,25.61 33.79,25.61 v33.92,25.48 34.05,25.48 34.17,25.61 35.44,24.34 37.22,24.34 39.21,26.33 | v29.73,27.13 29.85,27.26 29.85,27.9 29.6,28.15 29.6,32.21 29.98,32.6 33.92,32.6 34.43,33.1 v35.44,33.1 37.6,33.1 39.76,30.94 39.76,26.88 v39.38,26.5 39.21,26.33 | 39.21,26.33
ALERT  (via drill 0.35)
  Top 0.127: U3.5 8.61,13.13 v9.15,13.67
  Top 0.152: U4.P$J24 38.87,27.96 v38.87,27.39
  Bottom 0.127: v9.15,13.67 12.46,10.37 27.06,10.37 28.37,11.68 28.37,22.83 31.49,25.95 34.46,25.95 35.7,24.72 37.12,24.72 38.87,26.48 v38.87,27.39
D+
  Top 0.127: U4.P$AD6 31.66,26.04 31.58,25.96 31.58,25.92 24.28,18.63 18.19,18.63 16.97,19.85 D3.4
D-
  Top 0.127: U4.P$AD4 24.14,18.9 18.28,18.9 17.28,19.89 17.28,20.14 18.41,21.27 18.41,21.49 D3.6
DN
  Top 0.152: D3.1 18.87,25.76 21.46,28.36 J3.B7 21.46,29.42 21.19,29.68 20.7,29.68 20.46,29.44 J3.A7
DP
  Top 0.127: D3.3 16.97,25.68 17.53,26.24 18.42,26.24 19.96,27.78 J3.B6
  Top 0.152: J3.B6 19.96,28.39 20.23,28.13 20.72,28.13 20.96,28.37 J3.A6
EPD_3V3
  Top 0.152: J2.15 J2.16 | J2.15 35.86,18.61 | EPD_C5.2 33.54,16.97 35.02,18.46 35.43,18.46 J2.15
  Top 0.305: L1.2 C1-EP-DR.1 17.03,15.2 | 17.03,15.2 17.03,17.36 17.66,17.99 28.33,17.99 30.49,15.83 30.49,13.29 32.67,11.11 35.97,11.11 36.2,11.34 36.2,18.37 35.97,18.61 35.86,18.61 | Q1.3 14.91,15.2 17.03,15.2
EPD_BUSY  (via drill 0.35)
  Top 0.127: U4.P$AD12 33.29,25.61 32.08,24.4 v32.08,24.15 | v33.79,14.37 35.02,15.61 J2.9
  Bottom 0.127: v32.08,24.15 32.08,24.03 33.79,22.32 v33.79,14.37
EPD_CS
  Top 0.127: U4.P$K2 31,29.58 31,26.88 31.12,26.75 32.65,26.75 32.77,26.63 32.77,26.37 33.03,26.12 33.03,25.74 31.39,24.1 31.39,15.9 31.65,15.64 33.58,15.64 35.04,17.11 J2.12
EPD_DC
  Top 0.127: J2.11 35.2,16.61 33.98,15.39 31.54,15.39 31.14,15.8 31.14,24.27 32.79,25.92 U4.P$AD10
EPD_RST  (via drill 0.35)
  Top 0.127: U4.P$AC11 33.34,26.24 33.41,26.24 33.54,26.12 33.54,25.36 32.7,24.52 v32.7,24.39 | J2.10 35.1,16.11 33.81,14.82 v31.25,14.82
  Bottom 0.152: v31.25,14.82 31.38,14.94 31.38,24.09 32.01,24.72 32.37,24.72 v32.7,24.39
GDR  (via drill 0.35)
  Top 0.152: R2_EP_DR.2 25.9,7.7 Q3.1 26.15,7.45 v25.54,7.45 | 35.29,12.11 J2.2 35.15,12.11 v34.68,11.64
  Bottom 0.152: v25.54,7.45 25.66,7.58 29.6,7.58 32.39,4.78 35.82,4.78 38.11,2.5 41.66,2.5 44.59,5.42 44.59,8.59 43.95,9.23 38.24,9.23 35.82,11.64 v34.68,11.64
GND  (via drill 0.35)
  Top 0.127: C16.2 34.3,33.48 34.68,33.87 C13.2 | 25.92,25.74 IC3.9 | v24.01,22.69 25.51,24.18 25.51,24.47 | 26.42,25.49 IC3.8 | J3.A1_B12 24.48,29.48 J3.SH3
  Top 0.152: IC9.B1 IC9.C1 IC9.C2 IC9.C3 41.03,6.56 | 35.64,30.79 U4.P$F23 | U4.P$78 35.64,30.79 | U4.P$74 35.82,31.58 35.82,32.21 35.85,32.24 36.55,32.24 36.66,32.35 36.91,32.35 36.92,32.34 37.68,32.34 38.11,32.77 38.4,32.77 X1.4 39.19,33.04 | 39.19,33.04 39.44,32.79 39.44,32.53 39.56,32.42 39.6,32.42 X1.2 | 39.19,33.04 38.94,33.3 | 7.42,20.2 7.42,21.31 6.99,21.74 J1.5 J1.3 | J2.17 35.43,19.46 35.14,19.46 35.02,19.34 35.02,19.09 34.81,18.88 | IC2.B3 4.71,7.32 5.47,6.56 | IC2.B1 2.68,7.32 | 34.05,32.85 34.05,32.34 34.3,32.09 34.3,31.26 U4.P$77 33.54,30.49 U4.P$74 | U4.P$B7 32.04,31.39 U4.P$75 | U4.P$74 U4.P$80 U4.P$76 | U4.P$74 35.04,30.79 35.64,30.79 | U4.P$74 U4.P$81 U4.P$82 | U4.P$74 34.74,29.29 U4.P$86 | U4.P$74 U4.P$90 | U4.P$74 33.54,28.09 U4.P$88 | 32.34,29.29 U4.P$83 | U4.P$74 32.34,29.29 | 32.34,29.29 U4.P$79 | U4.P$74 U4.P$75 | U4.P$74 U4.P$85 U4.P$89 | U4.P$74 U4.P$87 | U3.6 6.99,12.4 U3.9 | C5.2 31.71,31.07 U4.P$75
  Top 0.305: 16.01,3.77 16.01,4.02
  Bottom 0.152: U4.P$87 31.23,27.49 29.85,26.12 v29.47,26.12
  other vias: 8.26,8.85 10.04,9.1 16.01,5.8 14.23,6.31 27.06,2.12 15.63,21.42 22.11,27.26 22.11,21.8 8.14,30.18 26.3,27.13 28.58,24.72 31.89,23.32 35.7,25.48 32.65,14.18 38.36,26.75 26.04,16.47 27.06,32.72 5.47,33.23 1.66,8.34 11.39,13.8
  pour Top: -0.85,-4.79 51.11,-4.79 51.11,39.5 -3.34,39.5 -3.34,-2.3
  pour Bottom: -0.85,-4.79 51.11,-4.79 51.11,39.5 -3.34,39.5 -3.34,-2.3
  pour Bottom: 42.12,1.56 34.65,9.02 10.53,9.02 10.51,9.04 9.25,10.29 2.96,10.29 1.74,9.07 1.74,5.32 5.5,1.56
  pour Bottom: 14.44,14.16 14.42,14.14 13.2,12.91 15.66,10.45 29.42,10.45 27,12.87 26.98,12.89 26.98,22.2 27,22.22 30.38,25.61 28.3,27.69 24.09,27.69 24.09,24.88 24.58,24.38 24.6,24.36 24.6,20.51 24.58,20.49 23.29,19.2 23.27,19.18 14.44,19.18
  pour Bottom: 30.95,12.89 30.93,12.87 29.71,11.64 37.25,4.1 44.76,4.1 44.76,17.96 40.97,21.76 40.95,21.78 40.95,31.88 38.54,31.88 36.02,26.85 36.01,26.84 36.01,26.83 36.01,26.83 36,26.82 35.99,26.82 35.99,26.81 35.99,26.81 35.98,26.81 35.97,26.8 35.96,26.8 35.96,26.8 35.95,26.8 34.71,26.8 30.95,23.04
HAPTIC_EN  (via drill 0.35)
  Top 0.152: IC2.A1 2.04,9.1 2.04,9.61 v2.17,9.73 | U4.P$U1 29.62,28.04 29.3,27.73 v29.3,27.61
  Bottom 0.152: v2.17,9.73 2.04,9.73 0.9,10.88 0.9,28.66 3.44,31.2 25.71,31.2 v29.3,27.61
IMU_INT1
  Top 0.127: IC3.5 27.82,26.24 27.82,26.98 28.52,27.67 28.52,27.8 29.5,28.79 30.03,28.79 U4.P$N1
IMU_INT2
  Top 0.127: IC3.6 27.57,26.48 27.57,27.08 28.26,27.78 28.26,27.91 29.39,29.04 29.85,29.04 30.11,29.29 30.29,29.29 U4.P$P2
LX1
  Top 0.152: L7.1 42.56,6.96 IC9.B3 IC9.B2
LX2
  Top 0.152: L7.2 42.56,6.16 IC9.D3 IC9.D2
MOSI  (via drill 0.35)
  Top 0.127: U4.P$B13 33.33,32.04 33.03,32.34 32.01,32.34 31.51,32.85 v31.51,33.3 | v33.28,16.34 35.05,18.11 J2.14
  Bottom 0.127: v33.28,16.34 33.28,14.05 33.41,13.93 34.17,13.93 37.47,17.23 37.47,24.11 38.64,25.27 39.4,25.27 40.1,25.98 40.1,32.25 38.62,33.74 32.01,33.74 31.58,33.3 v31.51,33.3
N$1
  Top 0.152: IC1.D1 10.69,10.53 R9.2
N$7
  Top 0.152: IC9.D1 39.32,6.16 38.92,6.56 38.92,8.64 R4.2
N$8
  Top 0.152: R2.2 37.45,5.76 IC9.E1
N$10
  Top 0.152: U4.P$C1 30.25,31.58 C5.1
N$13
  Top 0.152: U4.P$AC5 31.39,26.4 30.64,26.4 29.6,25.36 C20.1
N$18
  Top 0.152: C9.1 37.58,27.9 37.58,28.25 U4.P$N24
N$19
  Top 0.152: 40.83,25.99 C3.1 | L$1.1 41.93,25.99 C3.1 | U4.P$H23 36.34,30.35 36.91,30.35 40.78,26.48 C3.1
N$20
  Top 0.152: 41.97,27.13 C22.1 42.81,26.37 43.57,26.37 | 43.62,25.74 L$1.2 C4.1 44.46,26.37 43.57,26.37 | 43.57,26.37 44.01,26.82 ANT1.1
N$21
  Top 0.152: X1.3 40.12,33.94 39.89,34.18 37.66,34.18 37.58,34.1 C2.1 37.58,32.9 37.3,32.63 36.55,32.63 36.46,32.54 U4.P$A23
N$22
  Top 0.152: 38.61,31.96 X1.1 | U4.P$B24 38.01,30.82 38.28,30.82 C1.1 38.67,30.78 X1.1 | X1.1 38.4,31.62
N$23
  Top 0.152: C10.1 40.29,30.65 41.03,30.65 41.16,30.62 | 31.03,34.5 30.74,34.5 L3.2 | 31.03,34.5 32.65,34.5 | 31.03,34.5 31.03,32.55 U4.P$B5 | 32.65,34.5 33.79,34.5 | C15.1 32.65,34.5 | C16.1 33.79,34.5 | 41.16,30.62 41.16,30.72 41.28,30.69 41.28,33.89 40.94,34.23 39.94,34.5 38.49,34.5 | 41.16,30.62 41.16,27.52 40.32,27.52 U4.P$E24 | 33.79,34.5 38.49,34.5 | 38.49,34.5
N$24
  Top 0.152: U4.P$D23 36.61,31.29 36.66,31.35 36.91,31.35 39.35,28.91 C11.1
N$26
  Top 0.152: C13.1 34.81,32.56 U4.P$A18
N$27
  Top 0.152: L2.2 29.89,34.12 30.27,33.74 L3.1
N$28
  Top 0.152: U4.P$B3 31.04,32.19 29.62,33.61 L2.1
N$30
  Top 0.152: R3.2 24.53,24.83 IC3.1
N$32
  Top 0.152: 23.44,14.62 22.87,14.05 L1.1 23.76,10.88 23.76,8.59 27.82,8.59 29,7.42 Q3.3 | 23.44,14.62 23.89,15.07 23.89,16.09 C2-EP-DR.2 | D5.2 18.83,15.45 19.47,14.82 23.25,14.82 23.44,14.62
N$34
  Top 0.152: C2-EP-DR.1 24.77,14.21 D4.1 28.43,10.55 D2.2
N$35
  Top 0.152: SJ1.2 18.45,7.48 R_TYPE_SEL.2 21.37,7.2 R1_EP_DR'.1
N$39
  Top 0.152: C32.2 3.12,8.53 IC2.A2
N$40
  Top 0.152: EPD_C2.2 33.28,12.48 34.04,13.24 34.87,13.24 35,13.11 J2.4
N$41
  Top 0.152: EPD_C1.2 33.28,13.37 33.52,13.61 J2.5
N$43
  Top 0.152: J2.18 35.29,20.11 33.3,18.12 EPD_C6.2
N$44
  Top 0.152: EPD_C7.2 33.21,18.88 34.94,20.61 J2.19
N$45
  Top 0.152: EPD_C8.2 33.21,19.64 34.67,21.11 J2.20
N$47
  Top 0.127: EPD_C10.2 33.41,21.17 34.35,22.11 J2.22
N$49
  Top 0.127: EPD_C12.2 33.16,22.82 33.41,22.82 33.7,23.11 J2.24
N$51
  Top 0.152: J3.B5 18.96,28.37 18.38,27.79 R2_USB.1
N$57
  Top 0.152: J3.A5 21.96,28.15 20.84,27.03 R1_USB.2
OUT+
  Top 0.152: IC2.A3 4.32,11.31 OP.TP
OUT-
  Top 0.152: ON.TP 7.37,5.29 6.36,5.29 5.85,5.29 IC2.C3
P0.00/XL1
  Top 0.152: X2.1 26.55,32.39 C17.2 26.93,33.48 27.7,34.25 28.08,34.25 28.84,33.48 28.84,33.01 | 28.84,33.01 28.79,33.01 | U4.P$D2 30.64,31.44 30.64,32.19 29.82,33.01 28.84,33.01
P0.01/XL2
  Top 0.152: U4.P$F2 30.73,30.85 30.16,30.85 29.98,30.67 29.98,30.43 29.35,29.8 C18.2 28.33,29.29 X2.2
P0.13  (via drill 0.35)
  Top 0.127: U4.P$AD8 32.29,25.79 30.23,23.74 v30.23,22.44 | v23.12,5.8 23.82,5.11 24.01,5.11
  Top 0.152: SW_UP.2 21.62,5.08 21.93,5.4 R5.1 22.27,5.11 24.01,5.11 24.28,5.11 C30.2
  Bottom 0.127: v30.23,22.44 30.23,14.31 36.33,8.21 42.81,8.21 43.32,7.7 43.32,5.29 41.28,3.26 38.24,3.26 35.44,6.05 32.01,6.05 30.11,7.96 25.28,7.96 v23.12,5.8
P0.14  (via drill 0.35)
  Top 0.127: U4.P$AC9 32.01,26.02 32.01,25.99 29.75,23.73 v29.75,21.45 | v13.22,6.43 12.07,5.29 11.82,5.29
  Top 0.152: SW_ENT.2 10.54,4.8 11.42,5.69 | 11.42,5.69 12.4,6.67 R8.1 | 11.42,5.69 11.82,5.29 13.41,5.29 C31.2
  Bottom 0.127: v13.22,6.43 15.25,8.47 30.49,8.47 32.2,6.75 35.38,6.75 38.62,3.51 40.9,3.51 42.55,5.16 42.55,6.69 41.79,7.45 36.2,7.45 29.75,13.9 v29.75,21.45
P1.01  (via drill 0.35)
  Top 0.152: R_PWR_EPD.1 13.98,13.05 Q1.1 13.92,11.96 v13.85,11.89 | U4.P$Y23 36.29,27.47 36.59,27.77 36.84,27.77 37.73,26.88 v37.73,26.63
  Bottom 0.152: v13.85,11.89 14.74,11.01 26.17,11.01 27.57,12.4 27.57,23.04 31.13,26.6 34.96,26.6 35.57,25.99 37.09,25.99 v37.73,26.63
P1.02  (via drill 0.35)
  Top 0.127: 35.44,5.14 35.21,5.14 34.74,5.61 v34.68,5.61 | U4.P$W24 36.79,27.46 35.57,26.24 35.57,25.99 33.61,24.03 v33.22,24.03
  Top 0.152: SW_DN.2 32.6,4.26 33.66,5.33 R7.1 34.05,5.14 35.44,5.14 37.35,3.24 C29.2
  Bottom 0.127: v34.68,5.61 35.5,5.61 38.24,2.88 41.41,2.88 43.95,5.42 43.95,8.08 43.32,8.72 36.33,8.72 30.53,14.52 30.53,15.11 30.74,15.33 30.74,24.24 31.77,25.27 33.49,25.27 33.98,24.78 33.98,24.28 33.73,24.03 v33.22,24.03
PMIC_INT  (via drill 0.35)
  Top 0.127: U4.P$T2 29.97,28.29 29.95,28.31 29.38,28.31 28.77,27.7 28.77,27.57 28.08,26.87 28.08,24.35 23.68,19.96 v23.19,19.96
  Top 0.152: IC1.A1 11.49,12.73 10.93,13.29 v10.93,14.97
  Bottom 0.127: v23.19,19.96 22.36,20.78 15.25,20.78 14.49,20.02 14.49,16.72 12.73,14.97 v10.93,14.97
PREVGH
  Top 0.127: EPD_C9.2 33.28,20.4 34.48,21.61 J2.21
  Top 0.152: J2.21 36.4,21.61 36.56,21.45 36.56,11.19 36.12,10.75 32.52,10.75 30.11,13.16 30.11,15.58 28.2,17.48 23.22,17.48 D5.1
PREVGL
  Top 0.127: EPD_C11.2 33.54,21.93 34.22,22.61 J2.23
  Top 0.152: D4.2 28.71,13.93 32.38,10.26 36.08,10.26 37.12,11.3 37.12,21.65 36.2,22.56 35.62,22.56 J2.23
RESE  (via drill 0.35)
  Top 0.152: J2.3 34.73,12.61 v34.68,12.66 | v27.82,3.89 26.9,4.82 Q3.2 26.9,5.44 25.15,7.2 R1_EP_DR'.2
  Bottom 0.152: v34.68,12.66 35.7,12.66 38.49,9.86 44.46,9.86 45.22,9.1 45.22,5.29 41.92,1.99 37.98,1.99 35.82,4.15 28.08,4.15 v27.82,3.89
RESET  (via drill 0.35)
  Top 0.127: U4.P$AC13 33.75,26.54 34.05,26.24 34.55,26.24 34.55,25.48 33.66,24.59 v33.52,24.59
  Top 0.152: J1.6 8.68,22.24 9.55,21.38 13.43,21.38 RESET.TP 15.12,21.04 v15.12,19.64
  Bottom 0.152: 15.25,25.56 | 15.25,25.56 15.83,24.98 14.18,23.32 13.6,23.32 12.46,22.18 12.46,17.61 11.53,16.69 2.14,16.69 1.27,15.81 1.27,11.95 2.75,10.47 2.75,9.55 2.36,9.15 1.6,9.15 0.62,10.13 0.62,28.77 3.55,31.71 28.08,31.71 30.93,34.56 32.23,34.56 32.5,34.29 39.14,34.29 40.79,32.63 40.79,25.92 39.62,24.75 38.85,24.75 38.65,24.55 38.65,17.52 34.41,13.28 32.15,13.28 30.8,14.63 30.8,15 31.1,15.3 31.1,24.2 31.9,25 33.11,25 v33.52,24.59 | v15.12,19.64 22.86,19.64 23,19.5 23.74,19.5 25.3,21.05 25.3,23.71 23.69,25.32 23.48,25.32 23.24,25.56 15.25,25.56
SCK  (via drill 0.35)
  Top 0.127: U4.P$A12 33.21,32.54 32.77,32.98 32.14,32.98 32.01,33.1 32.01,33.23 32.01,33.48 v31.51,33.99 | J2.13 35.18,17.61 33.48,15.9 33.1,15.9 32.91,16.08 v31.83,16.08
  Bottom 0.127: v31.51,33.99 38.87,33.99 40.36,32.51 40.36,25.87 39.51,25.02 38.74,25.02 37.86,24.13 37.86,17.1 34.3,13.55 32.42,13.55 31.83,14.13 v31.83,16.08
SCL  (via drill 0.35)
  Top 0.127: 23.76,25.36 IC3.12
  Top 0.152: R17.2 35.32,8.34 SCL.TP | SCL.TP 36.15,9.17 37.94,9.17 R4.1 | 6.1,14.56 4.12,14.56 v2.68,13.12 2.55,13.12 1.21,11.77 1.21,8.15 2.79,6.57 3.06,6.57 IC2.C1 | U3.7 6.49,14.18 6.1,14.56 | v33.54,8.38 35.02,8.38 SCL.TP | 23.76,25.36 23.5,25.1 v23.5,24.86 | 6.1,14.56 9.16,14.56 10.68,13.05 10.68,12.12 11.46,11.33 IC1.B1
  Bottom 0.152: v33.54,8.38 33.08,8.38 33.03,8.34 31.76,8.34 30.62,9.48 12.2,9.48 9.66,12.02 3.56,12.02 2.68,12.91 v2.68,13.12 2.68,15.15 3.1,15.58 12.58,15.58 13.98,16.97 13.98,20.78 15.5,22.31 23.06,22.31 23.5,22.76 v23.5,24.86
SDA  (via drill 0.35)
  Top 0.127: IC2.B2 4.07,7.57 5.08,7.57 5.22,7.7 v5.22,9.99 5.22,12.36 U3.8 | v9.79,11.13 10.68,11.13 10.88,10.93 IC1.C1 | IC3.2 25.76,24.68 25.76,23.9 24.92,23.05 24.92,22.97 24.13,22.18 23.45,22.18 v22.87,22.76 | U4.P$L1 29.98,29.54 29.85,29.42 29.41,29.42 27.92,27.93 v27.41,27.93 | v22.74,24.72 22.74,25.01 v23.78,26.05
  Top 0.152: 36.64,6.94 R18.2 35.95,6.85 35.8,7 32.01,7 SDA.TP 31.34,7.7 v32.77,7.7 | R2.1 37.35,4.69 38.09,3.95 v39.61,3.95
  Bottom 0.127: v5.22,9.99 3.95,9.99 1.79,12.15 1.79,15.58 2.55,16.34 12.33,16.34 12.96,16.97 12.96,21.8 13.85,22.69 22.87,22.69 v22.87,22.76 22.87,24.34 22.74,24.47 v22.74,24.72
  Bottom 0.152: v5.22,9.99 8.01,9.99 9.15,11.13 v9.79,11.13 12.07,8.85 30.73,8.85 31.87,7.7 v32.77,7.7 34.93,7.7 38.68,3.95 v39.61,3.95 | v27.41,27.93 27.38,27.9 25.7,27.9 25.29,27.49 25.22,27.49 v23.78,26.05
SWDCLK  (via drill 0.35)
  Top 0.127: v36.79,26.92 U4.P$AA24
  Top 0.152: J1.4 9.13,24.38 12.88,24.38 SWDCLK.TP 14.87,26.88 v13.85,27.9
  Bottom 0.152: v36.79,26.92 37.09,27.22 37.09,32.09 30.74,32.09 30.74,27.51 29.86,26.63 29.48,26.63 27.72,28.38 25.79,28.38 25.18,27.77 23.36,27.77 23,28.13 14.08,28.13 v13.85,27.9
SWDIO  (via drill 0.35)
  Top 0.127: U4.P$AC24 36.74,26.5 v36.33,26.5
  Top 0.152: J1.2 8.67,25.19 8.67,26.68 12.17,30.18 SWDIO.TP 13.22,29.67 v14.36,29.67
  Bottom 0.152: v14.36,29.67 13.34,29.67 12.96,29.29 12.96,27.01 13.34,26.63 23.25,26.63 23.25,27.27 23.33,27.19 23.33,25.86 23.59,25.6 23.97,25.6 25.96,27.59 26.99,27.59 27.95,26.63 28.33,26.63 29.09,25.86 29.09,25.61 29.22,25.48 29.61,25.48 31.01,26.88 35.95,26.88 v36.33,26.5
SWO
  Top 0.152: 36.35,25.48 36.33,25.5 | 36.33,25.5 U4.P$AD22 | 36.33,25.5 36.33,23.32 37.6,22.05 37.6,11.39 36.9,10.69 36.9,10.2 37.22,9.89 44.83,9.89 44.97,9.74 44.97,4.91 43.7,3.64 43.7,3.51 43.13,2.95 SWO.TP 42.88,2.95
VBAT
  Top 0.305: IC1.C2 12.38,10.93 13.09,10.22 12.22,9.35 11.57,9.35 VBAT.TP | 10.04,7.83 VBAT.TP | 8.65,10.37 8.65,9.8 9.28,9.17 9.28,7.83 9.53,7.58 VBAT.TP | U3.2 6.74,11.16 | 6.74,11.16 U3.3 | 6.74,11.16 6.67,11.09 C27.2 7.63,9.35 8.65,10.37 | 8.65,10.37 8.65,11.89 8.77,12.02 9.21,12.02 C37.2
VBUS
  Top 0.305: J3.A4_B9 23.11,27.93 | J3.A4_B9 23.12,28.89 23.12,26.75 22.49,26.12 22.33,26.12 20.63,24.42 | J3.A9_B4 18.53,29.13 18.53,29.6 19.62,30.69 21.8,30.69 22.89,29.6 22.89,29.13 J3.A4_B9 | IC1.A2 11.89,12.22 12.26,12.59 C38.2 12.26,15.25 16.16,19.16 16.16,22.84 16.52,23.2 17.41,23.2 17.92,22.69 D3.5 17.92,22.25 17.92,22.56 18.3,22.94 18.55,23.2 20.08,23.2 | 20.63,24.42 20.2,23.99 20.2,23.32 20.08,23.2 | C42.1 20.63,22.57 | 20.63,22.57 20.63,24.42 | C43.1 20.2,22.14 20.63,22.57 | 20.08,23.2 19.57,22.69 C21.1 19.57,19.64 19.95,19.26 24,19.26 U4.P$AD2
VREG  (via drill 0.35)
  Top 0.305: C39.1 14.23,10.5 13.09,11.64 | 13.09,11.64 12.78,11.33 IC1.B2 | VREG.TP 31.38,9.86 v32.27,8.97 34.14,8.97 34.7,9.53 38.73,9.53 39.34,8.92 41.72,8.92 | IC9.A1 IC9.A2 IC9.A3 41.72,8.92 | 13.09,11.64 12.96,11.77 12.96,15 14.48,16.52 15.71,16.52 v16.01,16.21 | 41.72,8.92 C23.2 43.63,8.92 C24.2
  Bottom 0.305: v32.27,8.97 31.25,9.99 12.2,9.99 9.41,12.78 7.5,12.78 7.12,13.16 7.12,13.93 7.63,14.43 12.96,14.43 14.74,16.21 v16.01,16.21
(copper drawn outside any net)
  shapes: Top area x3

## Text on the board
tPlace: GND